# Altium PCB STM_BLUEPILL.PcbDoc
Units mm, origin at the board's own origin, x right, y up, seen from the top; angles counter-clockwise.
Board outline 50 x 50 mm, 4 copper layers (Top Layer, Int1 (GND), Int2 (PWR), Bottom Layer), stack 1.586 mm thick; 47 components, 49 nets, 199 pads, 86 vias.
Unrouted connection lines stored in the file: 87.
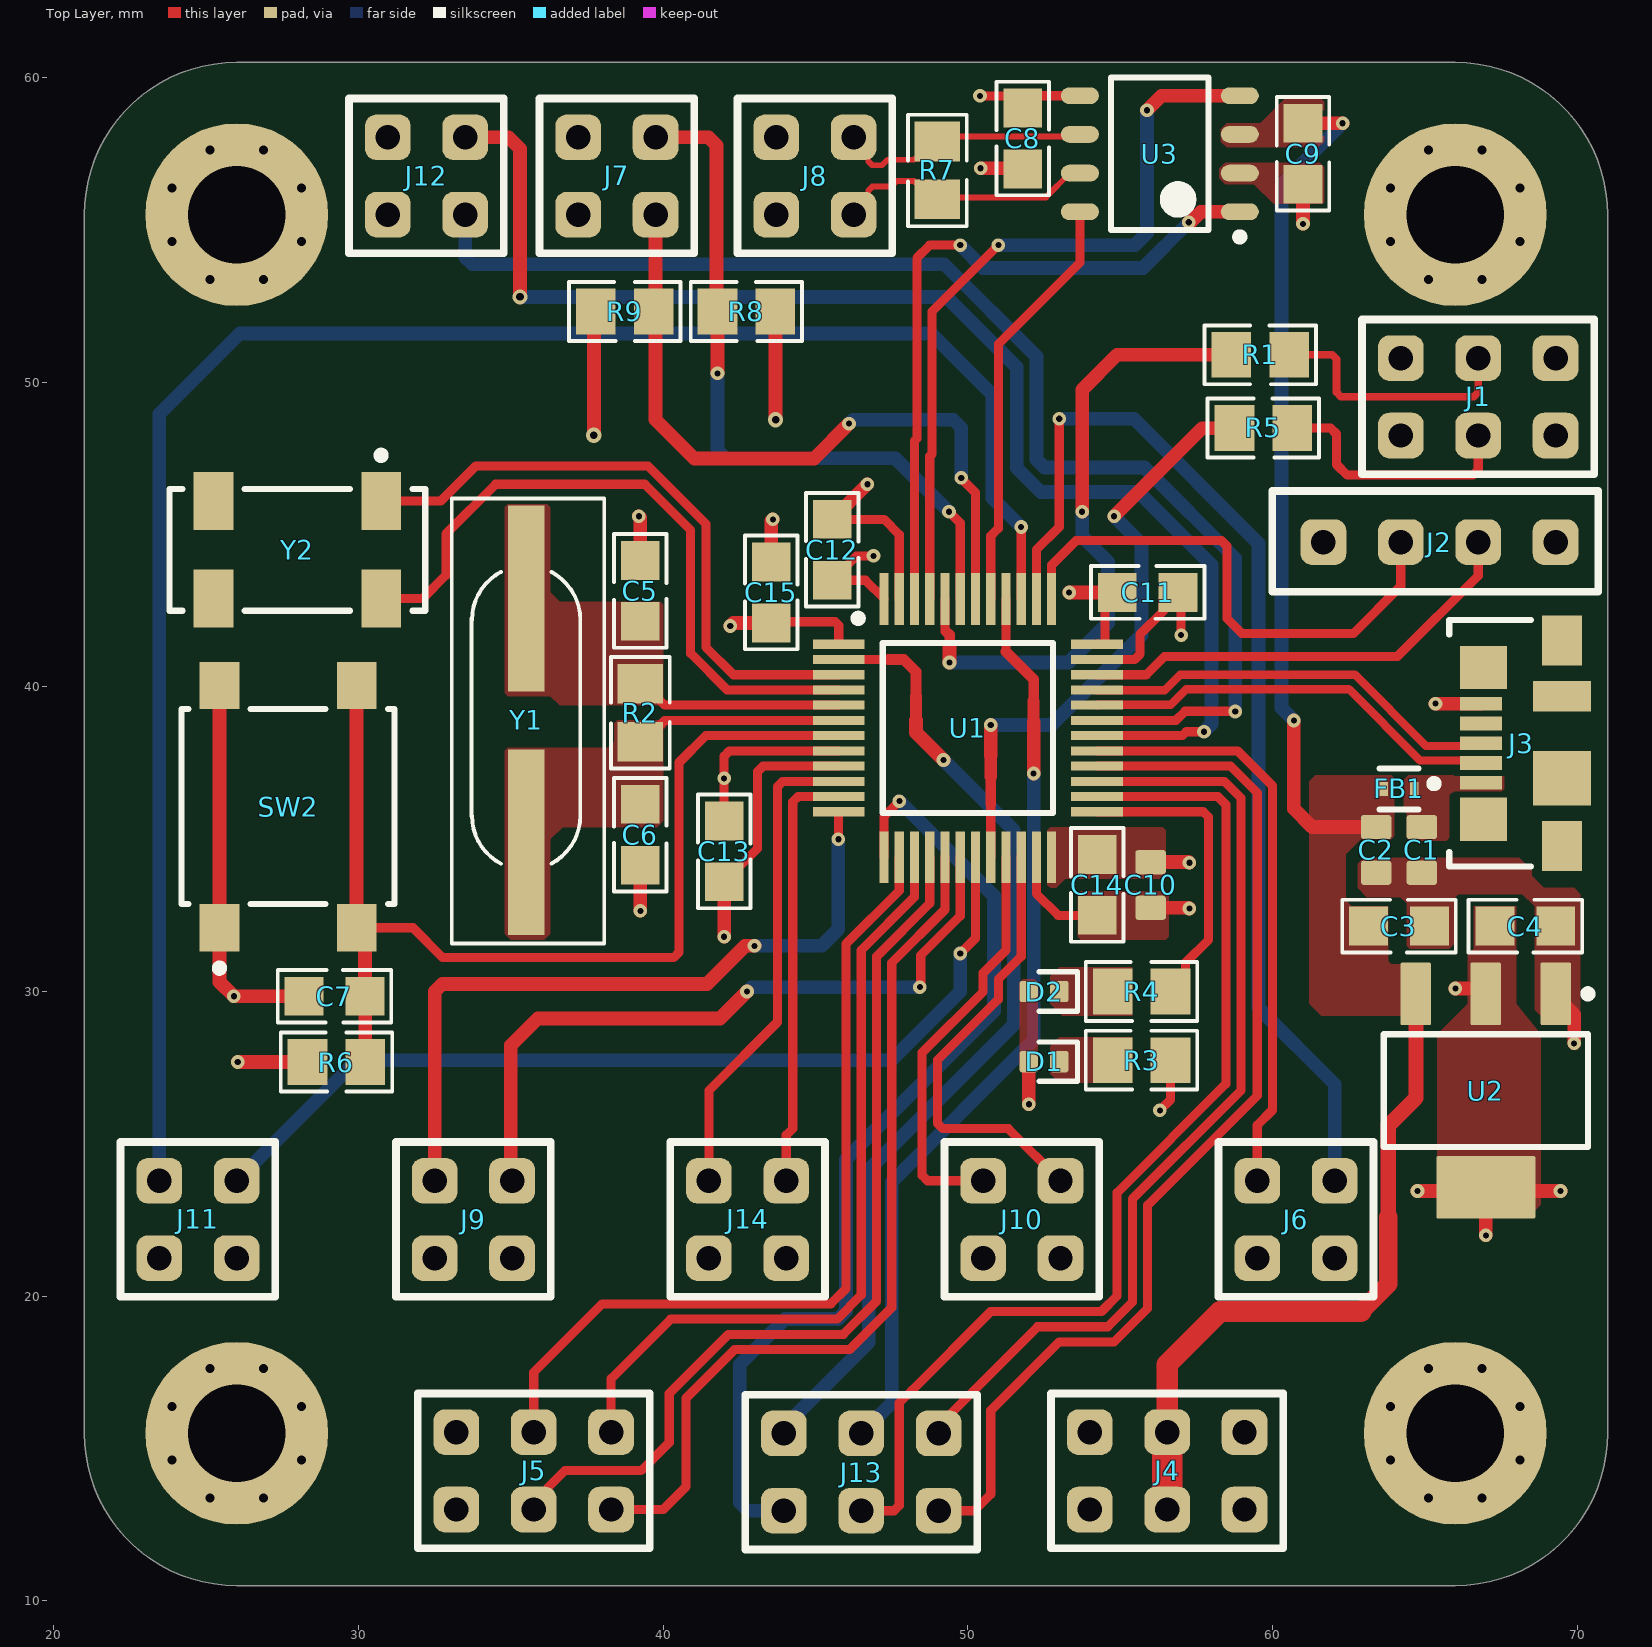
[diagram p0: Top Layer view]
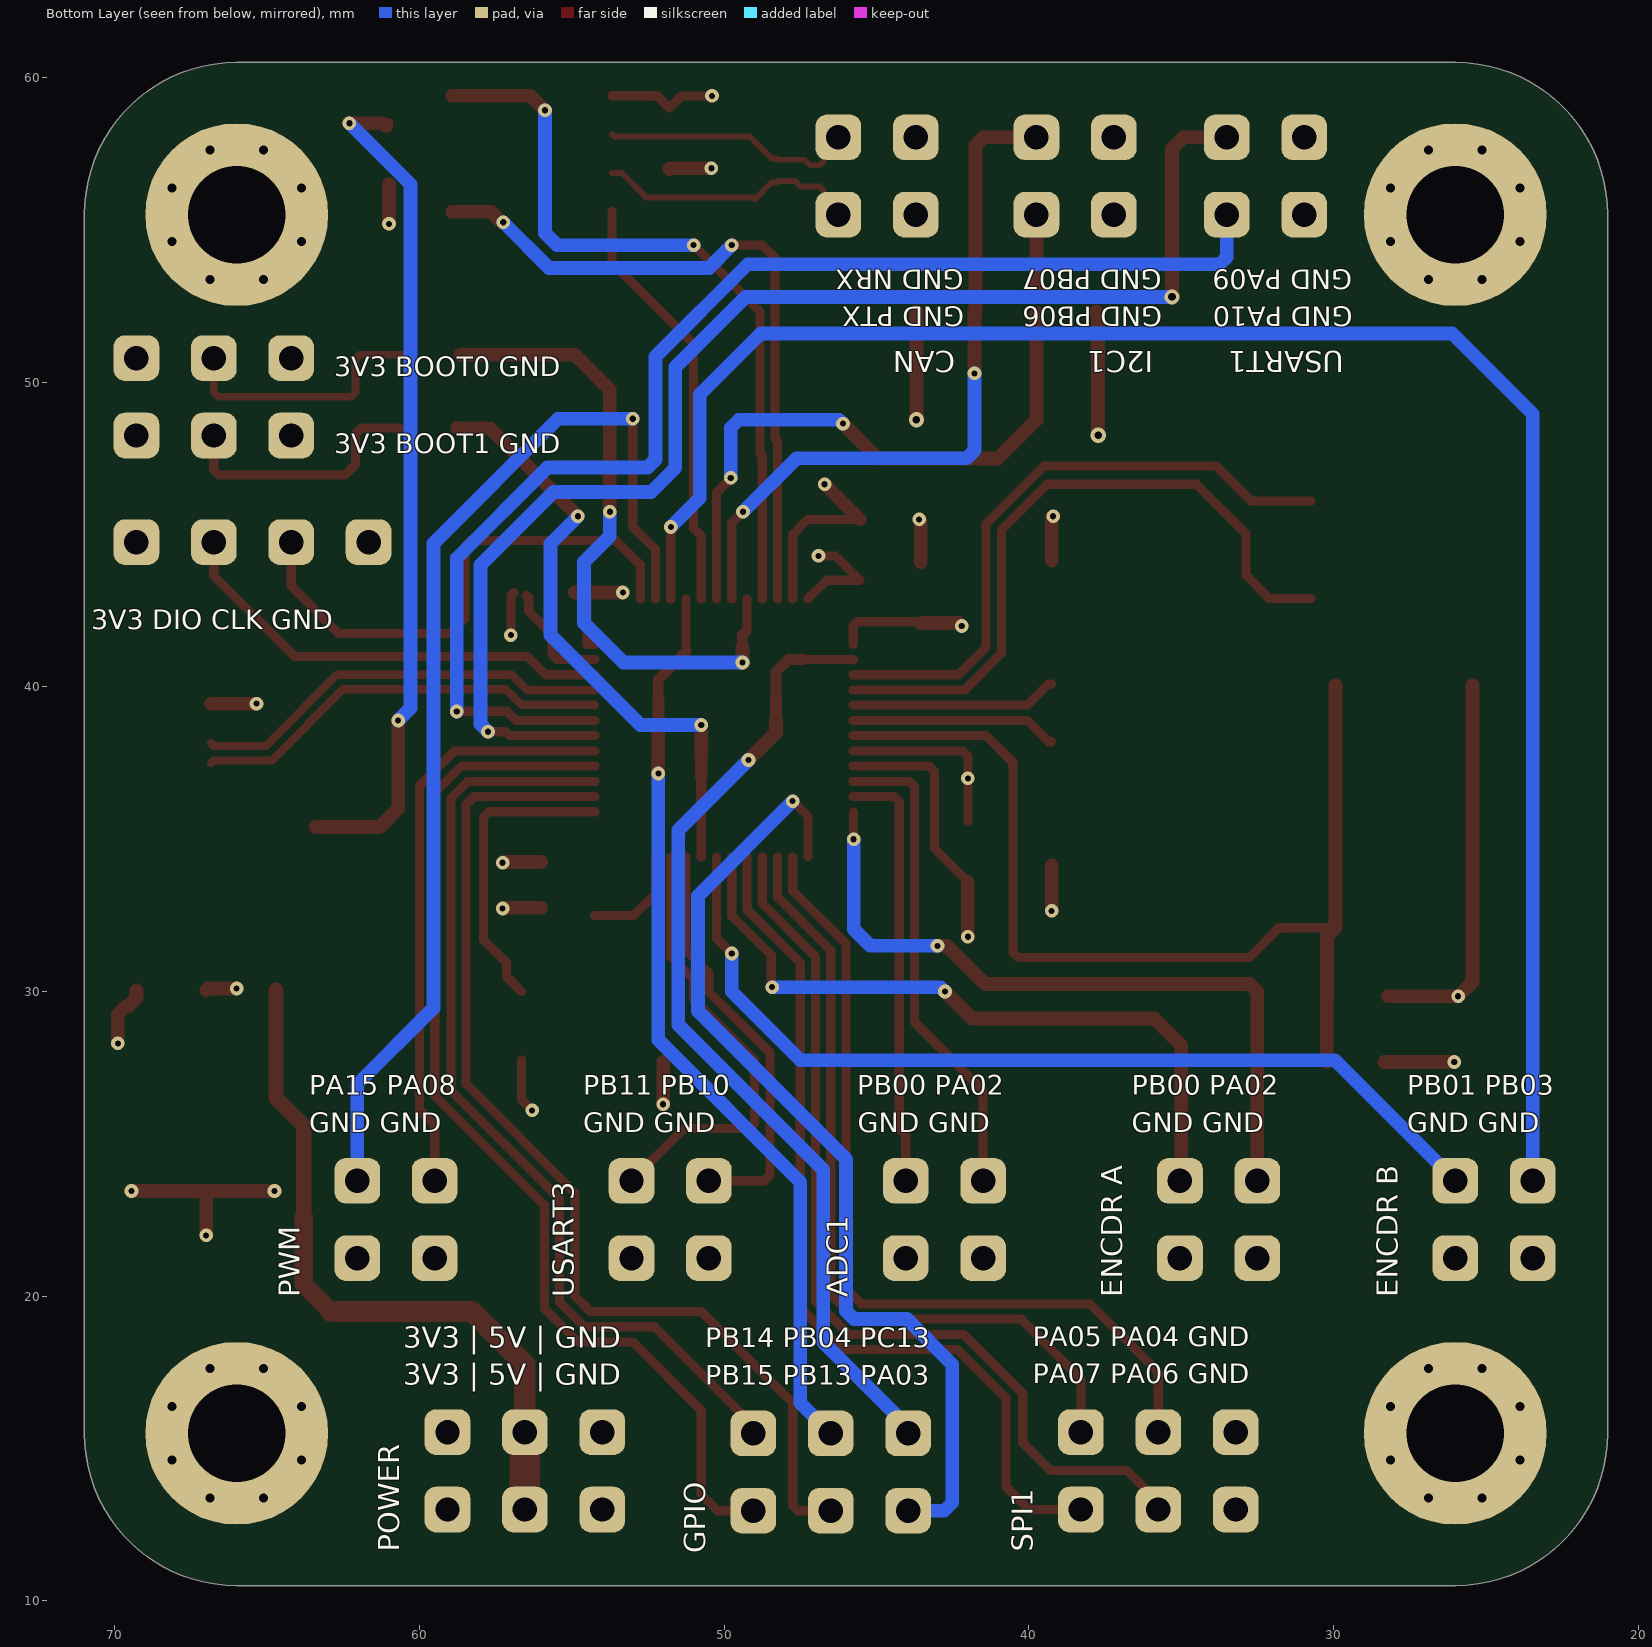
[diagram p1: Bottom Layer view, seen from below]
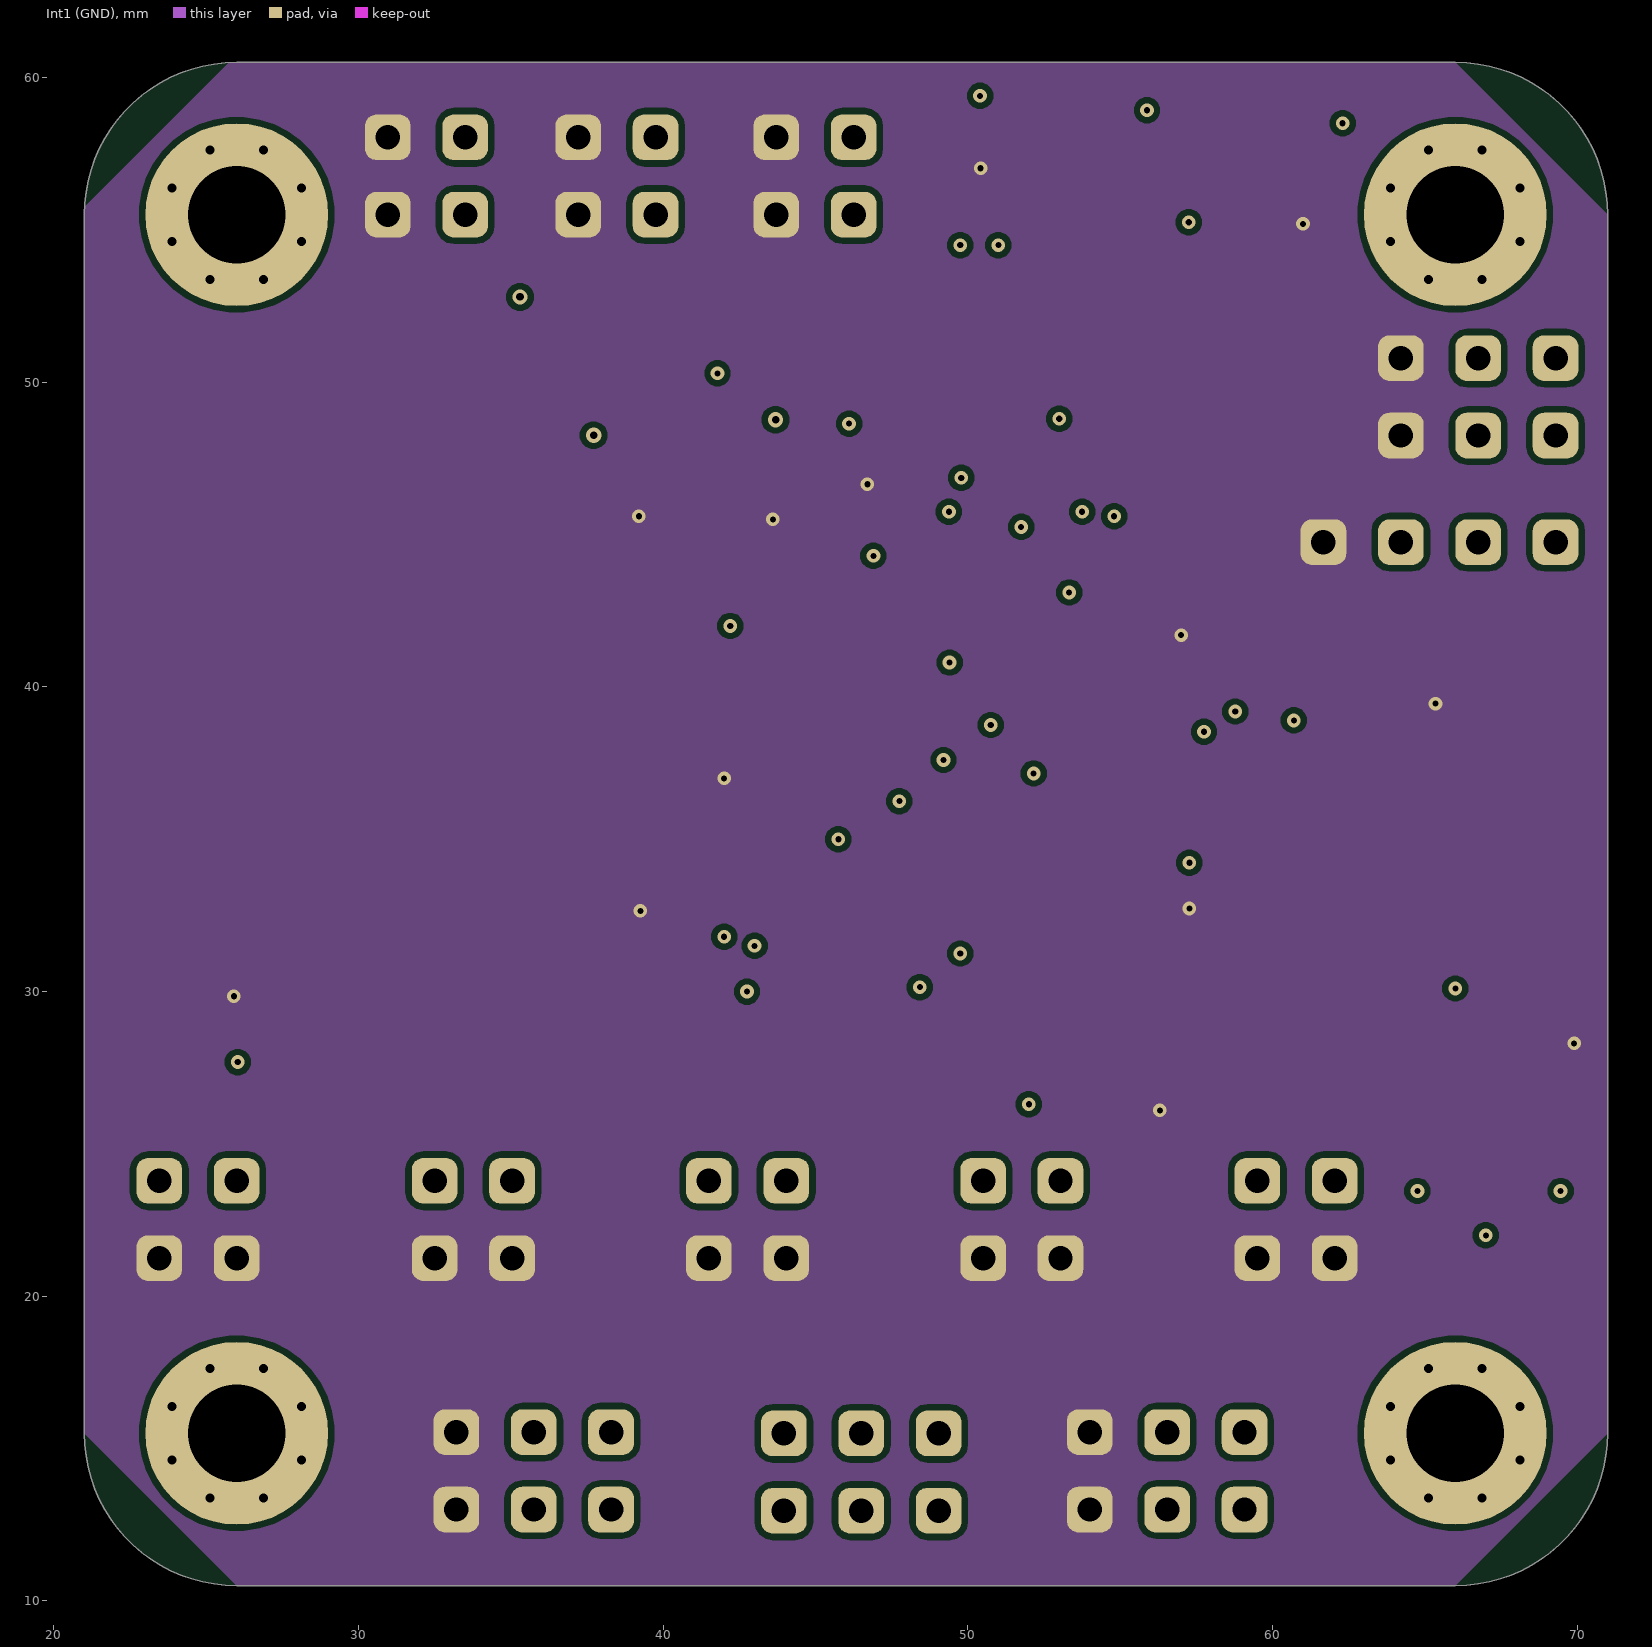
[diagram p2: Int1 (GND)]
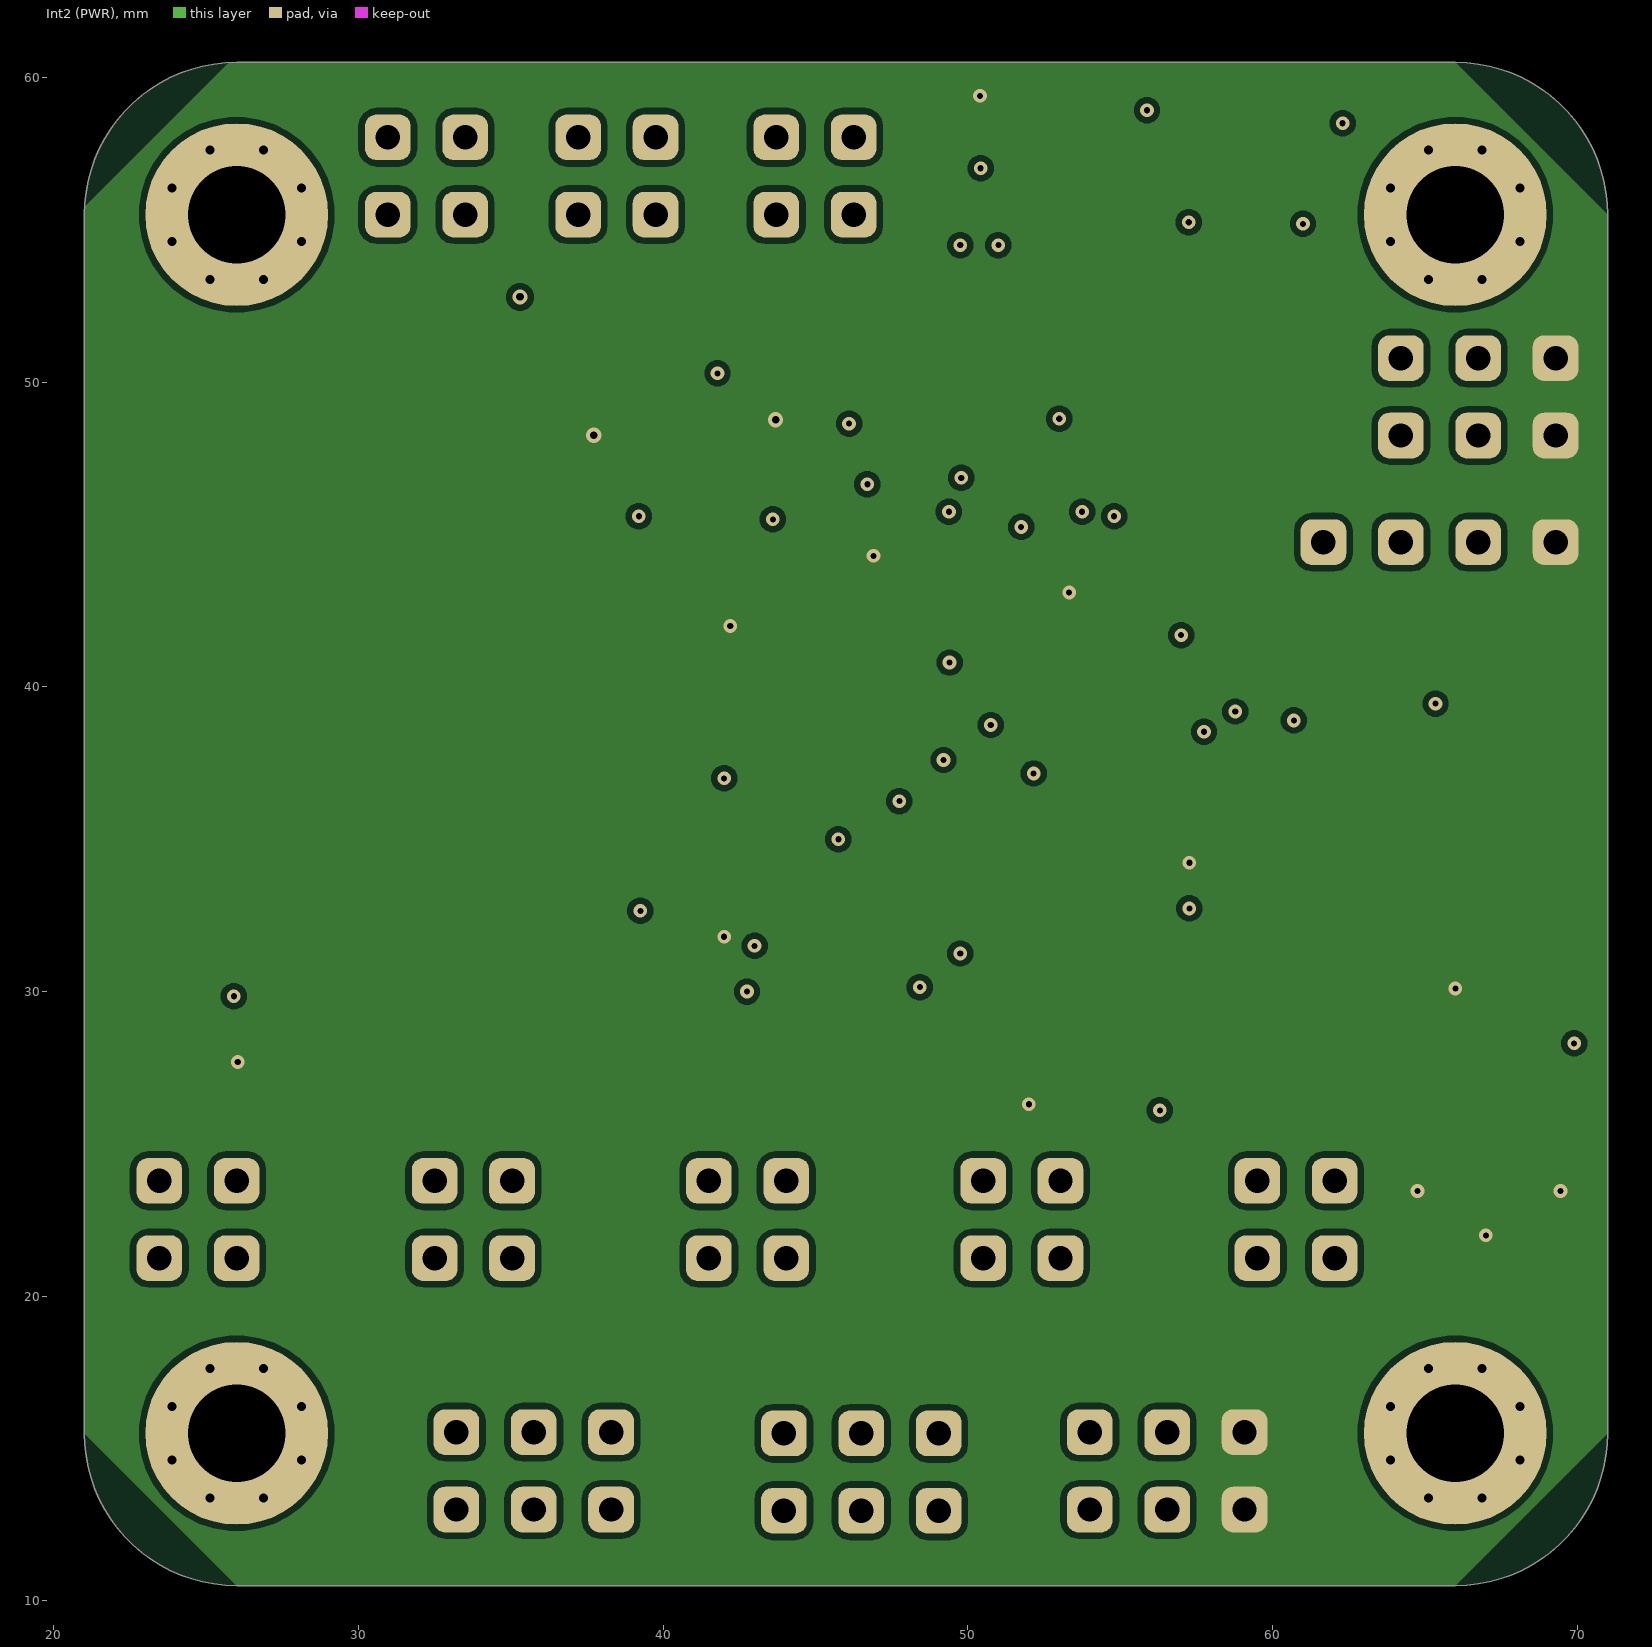
[diagram p3: Int2 (PWR)]

## Layer stack, top to bottom
Top Solder: solder mask 0.0254, SM-001, Dk 4
Top Layer: signal copper 0.035
Dielectric 1: prepreg 0.2104, PP-017, Dk 4.6
Int1 (GND): signal copper 0.0152
Dielectric 3: core 1.065, Core-039, Dk 4.6
Int2 (PWR): signal copper 0.0152
Dielectric 5: prepreg 0.2104, PP-017, Dk 4.6
Bottom Layer: signal copper 0.035
Bottom Solder: solder mask 0.0254, SM-001, Dk 4

## Board outline
21,15.5 21,55.5 cw(c26,55.5) 26,60.5 66,60.5 cw(c66,55.5) 71,55.5 71,15.5 cw(c66,15.5) 66,10.5 26,10.5 cw(c26,15.5)

## Design rules (kind name [scope] priority, off if disabled: settings)
Clearance [All] p1: gap=0.2 ignorepadtopadclearanceinfootprint=TRUE except(0.15: SMDPad-SMDPad; 0.35: Track-THPad)
DiffPairsRouting DiffPairsRouting_D120 [InDifferentialPair('CAN')] p1: maxlimit=0.508 minlimit=0.203 mostfreqgap=0.508 toplayer_mingap=0.508 toplayer_minwidth=0.194 toplayer_maxwidth=0.194 toplayer_prefwidth=0.194 bottomlayer_mingap=0.508 bottomlayer_minwidth=0.194 bottomlayer_maxwidth=0.194 bottomlayer_prefwidth=0.194 impedanceprofiledriven=TRUE impedanceprofileid={BCEBAB5D-B386-4F05-9C62-E750EE5C64B7} impedanceprofilevalue=120.000000 maxuncoupledlength=12.7
DiffPairsRouting DiffPairsRouting_D90 [InDifferentialPair('D')] p2: maxlimit=0.254 minlimit=0.203 mostfreqgap=0.254 toplayer_maxgap=0.203 toplayer_prefgap=0.203 toplayer_minwidth=0.271 toplayer_maxwidth=0.271 toplayer_prefwidth=0.271 bottomlayer_maxgap=0.203 bottomlayer_prefgap=0.203 bottomlayer_minwidth=0.271 bottomlayer_maxwidth=0.271 bottomlayer_prefwidth=0.271 impedanceprofiledriven=TRUE impedanceprofileid={09F78182-9738-4F9D-93D1-7A1E63A3F0BD} impedanceprofilevalue=90.000000 maxuncoupledlength=12.7
HoleSize [All] p1: absolutevalues=TRUE maxlimit=4 minlimit=0.025 maxpercent=80.000 minpercent=20.000
MinimumSolderMaskSliver [All] p1: minsoldermaskwidth=0
PolygonConnect [All] p1: connectstyle=Direct reliefconductorwidth=0.254 reliefentries=4 polygonreliefangle="90 Angle" airgapwidth=0.254
RoutingVias [All] p1: holewidth=0.25 width=0.5 viastyle="Through Hole" minholewidth=0.2 minwidth=0.45 maxholewidth=5 maxwidth=2
SilkToSilkClearance [All] p1: silktosilkclearance=0
SilkToSolderMaskClearance [IsPad] p1: minsilkscreentomaskgap=0 clearancetoexposedcopper=TRUE
SolderMaskExpansion [All] p1: expansion=0.102 istentingtop=FALSE
Width [All] p1: maxlimit=2 minlimit=0.2 preferedwidth=0.45
25 further rules are at their usual default settings.

## Classes and differential pairs
differential pair class DIFF_USB: D
differential pair CAN: +CAN_P -CAN_N
differential pair D: +D_P -D_N

## Components (designator, comment, footprint, x,y, rotation, side; value= is the part's Value field where it differs from the comment)
C1 "2.2u" CAP_0603 64.9,34.65 r90 top
C2 "2.2u" CAP_0603 63.4,34.65 r90 top
C3 "22u" CAP_0805 64.15,32.15 r180 top
C4 "22u" CAP_0805 68.3,32.15 r180 top
C5 "22pF" CAP_0805 39.25,43.15 r270 top
C6 "22pF" CAP_0805 39.25,35.15 r90 top
C7 "0.1uF" CAP_0805 29.21,29.845 r0 top
C8 "0.1uF" CAP_0805 51.8,58 r90 top
C9 "0.1uF" CAP_0805 61,57.5 r90 top
C10 "2.2u" CAP_0603 56,33.5 r90 top
C11 "0.1uF" CAP_0805 55.9,43.1 r180 top
C12 "0.1uF" CAP_0805 45.55,44.5 r270 top
C13 "0.1uF" CAP_0805 42,34.6 r270 top
C14 "0.1uF" CAP_0805 54.25,33.5 r90 top
C15 "0.1uF" CAP_0805 43.55,43.1 r270 top
D1 "GREEN" LED_0402_GREEN 52.5,27.7 r0 top
D2 "YELLOW" LED_0402_YELLOW 52.5,30 r0 top
FB1 "MPZ1005S121CTD25" FP-MPZ1005-IPC_C 64.15,36.65 r180 top
J1 "2X3 Berg Strip" CON6_100_59D78_TH_ST_DUPLICATE 69.29,50.79 r180 top
J2 "4X1 Bergstrip" CON4_100_40D72_TH_ST_MALE 61.67,44.75 r90 top
J3 "473460001" FP-473460001-MFG 69.15,38.15 r90 top
J4 "2X3 Berg Strip" CON6_100_59D78_TH_ST_DUPLICATE 59.08,15.54 r180 top
J5 "2X3 Berg Strip" CON6_100_59D78_TH_ST_DUPLICATE 38.29,15.54 r180 top
J6 "2X3 Berg Strip" CON4_100_59D78_TH_ST_DUPLICATE 59.5,23.79 r270 top
J7 "2X3 Berg Strip" CON4_100_59D78_TH_ST_DUPLICATE 39.75,58.04 r180 top
J8 "2X3 Berg Strip" CON4_100_59D78_TH_ST_DUPLICATE 46.25,58.04 r180 top
J9 "2X3 Berg Strip" CON4_100_59D78_TH_ST_DUPLICATE 32.5,23.79 r270 top
J10 "2X3 Berg Strip" CON4_100_59D78_TH_ST_DUPLICATE 50.5,23.79 r270 top
J11 "2X3 Berg Strip" CON4_100_59D78_TH_ST_DUPLICATE 23.46,23.79 r270 top
J12 "2X3 Berg Strip" CON4_100_59D78_TH_ST_DUPLICATE 33.5,58.04 r180 top
J13 "2X3 Berg Strip" CON6_100_59D78_TH_ST_DUPLICATE 49.04,15.5 r180 top
J14 "2X3 Berg Strip" CON4_100_59D78_TH_ST_DUPLICATE 41.5,23.79 r270 top
R1 "10K" RES_0805 59.6,50.9 r180 top
R2 "10Mohm" RES_0805 39.25,39.15 r90 top
R3 "1K" RES_0805 55.7,27.75 r0 top
R4 "1K" RES_0805 55.7,30 r0 top
R5 "10K" RES_0805 59.7,48.5 r180 top
R6 "10K" RES_0805 29.276,27.686 r0 top
R7 "120R" RES_0805 49,56.95 r90 top
R8 "10K" RES_0805 42.733,52.324 r180 top
R9 "10K" RES_0805 38.735,52.324 r0 top
SW2 "B3S-1000P" FP-B3S-1000P-MFG 27.686,36.068 r90 top
U1 "STM32F103C8T6" LQFP-48_19.6_393_58X11_SMD 50,38.65 r0 top
U2 "TLV1117LV33DCYT" DCY0004A_M 67,26.75 r270 top
U3 "TJA1051T/3,118" NXP-SOIC-8_L 56.3,57.5 r180 top
Y1 "8MHz" XTAL_314_240X47_SMD 35.5,42.9 r270 top
Y2 "ABS25-32.768KHZ-T" FP-ABS25-MFG 27.991,44.501 r180 top

## Footprints (in the part's own frame and the unit in brackets; to place one, negate y for a bottom-side part, rotate by r counter-clockwise, add the part's x,y. Pads: shape width x height; smd on the part's side, far side on the other; paste and mask are expansions set on the pad)
CAP_0603 [mm]
  rrect25% 0.8x1 smd: 1(-0.75,0) 2(0.75,0)
  body extent -0.8,-0.4 0.8,0.4, height 0.51
CAP_0805 [mm] "Ceramic Capacitor"
  rect 1.27x1.27 smd mask+0.076: 1(-1,0) 2(1,0)
  silkscreen extent -1.86,-0.86 1.86,0.86, body extent -1,-0.62 1,0.63, height 0.78
CON4_100_40D72_TH_ST_MALE [mm] "Berg Strip"
  rrect50% 1.5x1.5 hole 0.8: 1(0,0) 2(0,-2.54) 3(0,-5.08) 4(0,-7.62)
  silkscreen extent -1.63,-9.02 1.68,1.68, body extent -1.27,-8.89 1.27,1.27, height 9.5
CON4_100_59D78_TH_ST_DUPLICATE [mm] "Berg Strip"
  rrect50% 1.5x1.5 hole 0.8: 1(0,0) 2(0,2.54) 3(2.54,0) 4(2.54,2.54)
  silkscreen extent -1.27,-1.27 3.81,3.81, body extent -1.27,-1.27 3.81,3.81, height 9.5
CON6_100_59D78_TH_ST_DUPLICATE [mm] "Berg strip"
  rrect50% 1.5x1.5 hole 0.8: 1(0,0) 2(0,2.54) 3(2.54,0) 4(2.54,2.54) 5(5.08,0) 6(5.08,2.54)
  silkscreen extent -1.27,-1.27 6.35,3.81, body extent -1.27,-1.27 6.35,3.81, height 9.5
DCY0004A_M [mm] "SOT223, 4-Leads, Body 6.7x3.7mm, Pitch 2.3mm, IPC Low Density"
  rrect10% 2.05x1 smd: 1(-3.175,2.3) 2(-3.175,0) 3(-3.175,-2.3)
  rrect5% 2.05x3.25 smd: 4(3.175,0)
  silkscreen extent -3.3,-3.35 1.85,3.48, body extent -3.5,-3.25 3.5,3.25, height 1.62
FP-473460001-MFG [mm]
  rect 0.45x1.38 smd paste+0 mask+0: 1(-1.3,2.31) 2(-0.65,2.31) 3(0,2.31) 4(0.65,2.31) 5(1.3,2.31)
  rect 1.425x1.55 smd paste+0 mask+0: 6(-2.488,2.225) 7(2.488,2.225)
  rect 1.65x1.3 smd paste+0 mask+0: 8(-3.375,-0.35) 11(3.375,-0.35)
  rect 1.8x1.9 smd paste+0 mask+0: 9(-1.15,-0.35)
  rect 1x1.9 smd paste+0 mask+0: 10(1.55,-0.35)
  silkscreen extent -4.05,0.67 4.05,3.97, body extent -4.3,-2.48 4.3,3.45, height 0.25
FP-ABS25-MFG [mm]
  rect 1.3x1.9 smd paste+0 mask+0: 1(-2.75,-1.6) 2(2.75,-1.6) 3(2.75,1.6) 4(-2.75,1.6)
  silkscreen extent -4.2,-3.22 4.2,2, body extent -4.3,-2.65 4.3,2.65, height 0.25
FP-B3S-1000P-MFG [mm]
  rect 1.55x1.3 smd paste+0 mask+0: 1(-3.975,2.25) 2(3.975,2.25) 3(-3.975,-2.25) 4(3.975,-2.25)
  silkscreen extent -5.42,-3.5 3.2,3.5, body extent -4.85,-3.6 4.85,3.6, height 0.25
FP-MPZ1005-IPC_C [mm]
  rect 0.272x0.472 smd paste+0 mask+0: 1(-0.5,0) 2(0.5,0)
  silkscreen extent -0.64,-0.67 0.64,0.67, body extent -0.74,-0.38 0.74,0.38, height 0.25
LED_0402_GREEN [mm]
  rrect25% 0.6x0.7 smd: A(-0.5,0) K(0.5,0)
  silkscreen extent -0.15,-0.65 1.1,0.65, body extent -0.51,-0.25 0.51,0.25, height 0.45
LED_0402_YELLOW [mm]
  rrect25% 0.6x0.7 smd: A(-0.5,0) K(0.5,0)
  silkscreen extent -0.15,-0.65 1.1,0.65, body extent -0.51,-0.25 0.51,0.25, height 0.45
LQFP-48_19.6_393_58X11_SMD [mm] "48LQFP"
  rect 1.7x0.3 smd mask+0.076: 1(-4.238,2.75) 2(-4.238,2.25) 3(-4.238,1.75) 4(-4.238,1.25) 5(-4.238,0.75) 6(-4.238,0.25) 7(-4.238,-0.25) 8(-4.238,-0.75) 9(-4.238,-1.25) 10(-4.238,-1.75) 11(-4.238,-2.25) 12(-4.238,-2.75) 25(4.238,-2.75) 26(4.238,-2.25) 27(4.238,-1.75) 28(4.238,-1.25) 29(4.238,-0.75) 30(4.238,-0.25) 31(4.238,0.25) 32(4.238,0.75) 33(4.238,1.25) 34(4.238,1.75) 35(4.238,2.25) 36(4.238,2.75)
  rect 0.3x1.7 smd mask+0.076: 13(-2.75,-4.238) 14(-2.25,-4.238) 15(-1.75,-4.238) 16(-1.25,-4.238) 17(-0.75,-4.238) 18(-0.25,-4.238) 19(0.25,-4.238) 20(0.75,-4.238) 21(1.25,-4.238) 22(1.75,-4.238) 23(2.25,-4.238) 24(2.75,-4.238) 37(2.75,4.238) 38(2.25,4.238) 39(1.75,4.238) 40(1.25,4.238) 41(0.75,4.238) 42(0.25,4.238) 43(-0.25,4.238) 44(-0.75,4.238) 45(-1.25,4.238) 46(-1.75,4.238) 47(-2.25,4.238) 48(-2.75,4.238)
  silkscreen extent -3.72,-2.79 2.79,3.72, body extent -4.5,-4.5 4.5,4.5, height 1.7
NXP-SOIC-8_L [mm] "SOIC, 8-Leads, Body 5x4mm, Pitch 1.27mm, IPC High Density"
  oval 1.25x0.55 smd: 1(-2.625,1.905) 2(-2.625,0.635) 3(-2.625,-0.635) 4(-2.625,-1.905) 5(2.625,-1.905) 6(2.625,-0.635) 7(2.625,0.635) 8(2.625,1.905)
  silkscreen extent -2.75,-2.5 1.6,2.85, body extent -3,-2.5 3,2.5, height 1.75
RES_0805 [mm] "Resister"
  rect 1.3x1.5 smd mask+0.076: 1(0.95,0) 2(-0.95,0)
  silkscreen extent -1.83,-0.97 1.83,0.97, body extent -1,-0.63 1,0.62, height 0.5
XTAL_314_240X47_SMD [mm] "CASE: TH"
  rect 6.096x1.2 smd: 1(0,0) 2(8,0)
  silkscreen extent -3.29,-2.44 11.32,2.57, body extent -2.99,-2.27 10.9,2.41, height 3.05

## Part data
C1 C2 C10: library part CAP_0603, "Capacitor SMD 0603"
C3 C4: library part CAP_0805, "Capacitor SMD 0805"
C5 C6: library part CAP_22pF-50V-5%-0805, "22pF ±5% 50V Ceramic Capacitor C0G, NP0 0805 (2012 Metric)", Case/Package=0805, Manufacturer=KEMET, Manufacturer Part Number=C0805C220J5GACTU, Supplier Part Number-1=399-1113-1-ND, Supplier-1=Digikey
C7 C8 C9 C11 C12 C13 C14 C15: library part CAP_0.1uF-50V-5%-0805, "0.1µF ±5% 50V Ceramic Capacitor X7R 0805 (2012 Metric)", Case/Package="0805 (2012 Metric)", Manufacturer=KEMET, Manufacturing Part Number=C0805C104J5RACTU, Supplier Part Number-1=399-1171-1-ND, Supplier-1=Digikey
D1: library part LED_0402_GREEN, "LED 0402 GREEN SMD"
D2: library part LED_0402_YELLOW, "LED 0402 YELLOW SMD"
FB1: library part CMP-08257-000074-1, "Power line Ferrite Bead 120Ω @ 100MHz 1.2A DCR 0.09Ω AEC-Q200 SMD 0402", Case Code (Imperial)=0402, Case Code (Metric)=1005, DC Resistance (DCR)=90mR, Max Current Rating=1.2A, Max Operating Temperature=125°C, Min Operating Temperature=-55°C, Package Quantity=10000, Ratings=AEC-Q200, Test Frequency=100MHz, Tolerance=25%, Case/Package=0402, Height=0.022inch, Impedance=120R, Lead Free="Lead Free", Length=0.039inch, Max DC Current=1.2A, Mount="Surface Mount", Number of Lines=1, Packaging="Tape and Reel", RoHS Compliant=Yes, Termination=SMD/SMT, Weight=2.3E-05oz, Width=0.02inch
J1 J4 J5 J13: library part CON-BS-PLG_2X3-100-TH-ST, "6 pin, 2 row, 2.54mm pitch bergstrip", Case/Package=TH, Manufacturer=NA, Manufacturer Part Number=NA, Supplier Part Number-1=NA, Supplier-1=NA
J2: library part CON-BS-PLG_4X1-100-TH-ST, "4 pin, 1 row, 2.54mm pitch bergstrip", Case/Package=TH, Manufacturer=NA, Manufacturing Part Number=NA, Supplier Part Number-1=NA, Supplier-1=NA
J3: library part CMP-2000-05246-2, "CONN RCPT USB2.0 MICRO B SMD R/A", Current Rating=1.8A, Manufacturer=Molex, Package=0, Temperature="-30°C to +85°C", Temperature Range High=+85°C, Temperature Range Low=-30°C, Voltage Rating=30V, Automotive=No, Category=Conn, ComponentLink2Description=Datasheet, ComponentLink2URL=https://www.molex.com/webdocs/datasheets/pdf/en-us/0473460001_IO_CONNECTORS.pdf, Conn Orientation="Right Angle", Contact Material=Gold,Nickel, Device Class L1=Connectors, Device Class L2="USB Connectors", Device Class L3=unset, Digikey Description="CONN RCPT USB2.0 MICRO B SMD R/A", Footprint Url=https://www.molex.com/pdm_docs/sd/473460001_sd.pdf, Height=2.945mm, Is Female=yes, Lead Free=Yes, Manufacturer Part Number=473460001, Number Of Contacts=5, Octopart=https://octopart.com/47346-0001-molex-7164928, Pitch=0.65mm, RoHS=TRUE, Shielding=true, Usb Standard="USB 2.0"
J6 J7 J8 J9 J10 J11 J12 J14: library part CON-BS-PLG_2X2-100-TH-ST, "4 pin, 2 row, 2.54mm pitch bergstrip"
R1 R5 R6 R8 R9: library part RES_10K-0.125W-1%-0805, "10 kOhms ±1% 0.125W, 1/8W Chip Resistor 0805 (2012 Metric) Moisture Resistant Thick Film", Case/Package=0805, Manufacturer=Yageo, Manufacturing Part Number=RC0805FR-0710KL, Supplier Part Number-1=311-10.0KCRCT-ND, Supplier-1=Digikey
R2: library part RES_10MOHM-0.125W-1%-0805, "10 MOhms ±1% 0.125W, 1/8W Chip Resistor 0805 (2012 Metric) Automotive AEC-Q200, High Voltage Thick Film", Case/Package="0805 (2012 Metric)", Manufacturer="Rohm Semiconductor", Manufacturing Part Number=KTR10EZPF1005, Supplier Part Number-1=RHM10.0MAHCT-ND, Supplier-1=Digikey
R3 R4: library part RES_1K-0.125W-1%-0805, "1 kOhms ±1% 0.125W, 1/8W Chip Resistor 0805 (2012 Metric) Moisture Resistant Thick Film", Case/Package=0805, Manufacturer=垈㎵á, Manufacturer Part Number=RC0805FR-071KL, Supplier Part Number-1=311-1.00KCRCT-ND, Supplier-1=Digikey
R7: library part RES_0805, "Resistor SMD 0805"
SW2: library part CMP-08834-000008-1, "SWITCH TACTILE SPST-NO 0.05A 24V", Contact Current Rating=50mA, Contact Resistance=100mR, Max Operating Temperature=70°C, Max Voltage Rating (DC)=24V, Min Operating Temperature=-25°C, Operating Force=1.57N, Package Quantity=1, Ratings=IP67, Actuator Length=0.8mm, Actuator Type=Standard, Contact Material=Bronze, Contact Plating=Silver, Current Rating=50mA, Depth=9mm, Electrical Life=500000Cycles, Height=3.65mm, Illumination Type=Non-Illuminated, Lead Free="Lead Free", Length=6.6mm, Max Current Rating=50mA, Mechanical Life=500000Cycles, Mount="Surface Mount", Number of Poles=1, Orientation=Straight, Packaging="Tape and Reel", Radiation Hardening=No, REACH SVHC="No SVHC", Switch Function=Off-Mom, Switch Travel=0.25mm, Termination="Gull Wing", Throw Configuration=SPST, Voltage Rating (DC)=24V, Weight=0.010582oz, Width=6mm
U1: library part "IC-STM32F103C8T6 _1", "ARM® Cortex®-M3 STM32F1 Microcontroller IC 32-Bit 72MHz 64KB (64K x 8) FLASH", Case/Package=48-LQFP, Manufacturer=STMicroelectronics, Supplier Part Number-1=497-6063-ND, Manufacturer Part Number=STM32F103C8T6, Supplier-1=Digikey
U2: library part CMP-0395-00499-2, "Single Output LDO, 1 A, Fixed 3.3 V Output, 2 to 5.5 V Input, 4-pin SOT-223 (DCY), -40 to 125 degC, Green (RoHS & no Sb/Br)", Manufacturer="Texas Instruments", Accuracy(%)=2, Code_JEDEC=TO-261, ComponentLink1Description="Manufacturer URL", ComponentLink1URL=http://www.ti.com/, ComponentLink2Description=Datasheet, ComponentLink2URL=http://www.ti.com/general/docs/lit/getliterature.tsp?genericPartNumber=TLV1117LV33&fileType=pdf, ComponentLink3Description="Package Specification", ComponentLink3URL=http://www.ti.com/litv/pdf/mpds094a, DatasheetVersion=SBVS160A, Eco-Plan="Green (RoHS & no Sb/Br)", Fixed Output Options(V)=3.3, Iout(Max)(A)=1, Iq(Typ)(mA)=0.05, Mounting Technology="Surface Mount", PackageDescription="4-Pin Plastic Small Outline, Body 3.5 x 6.5 mm, Pitch 2.3 mm", PackageReference=DCY0004A, PackageVersion=4202506/B, PartNumber=TLV1117LV33DCYT, SubFamily="Single Channel LDO", Vdo(Typ)(mV)=1200, Vin(Max)(V)=5.5, Vin(Min)(V)=2, Vout Adj(Max)(V)=3.3, Vout Adj(Min)(V)=3.3
U3: library part CMP-2000-07245-1, "High-Speed CAN Transceiver, 3 to 5 V, 8-Pin SOIC (SOT96-1), RoHS, Tape and Reel", Manufacturer=NXP, Operating Supply Voltage (Max)=5.5V, Operating Supply Voltage (Min)=4.5V, Operating Supply Voltage (Typ)=5V, Operating Temperature (Max)=125C, Operating Temperature (Min)=-40C, Operating Temperature Classification=Automotive, Package Description="8-Pin Small Outline Integrated Circuit, Body 4.9 x 3.9 mm, Pitch 1.27 mm", Package Reference=SOT96-1, Package Type=SO, Power Down Mode=Normal/Silent, Supply Current=70mA, Category=Transceiver, Data Rate=1Mbps, Datasheet URL=http://www.nxp.com/documents/data_sheet/TJA1051.pdf, Datasheet Version="Rev. 7, 01/2015", DELETED=Compliant, Manufacturer URL=http://www.nxp.com/, Mounting=SurfaceMount, Mounting Technology=SurfaceMount, Number of Transceivers=1, Packaging=TapeandReel, Pin Count=8, Rad Hardened=No, Standard Supported=ISO11898-2
Y1: library part XTAL_8MHZ-LFXTAL030234, "Crystals 8MHz 22pF -20C 70C", Case/Package=SMD, Manufacturer="IQD Frequency Products", Manufacturing Part Number=LFXTAL030234Reel, Supplier Part Number-1=449-LFXTAL030234REEL, Supplier-1=Mouser
Y2: library part CMP-2000-05037-2, "CRYSTAL 32.7680KHZ 12.5PF SMD", Case/Package=SMD/SMT, ESR (Equivalent Series Resistance)=50kR, Frequency=32.768kHz, Frequency Tolerance=20ppm, Load Capacitance=12.5pF, Max Operating Temperature=85°C, Min Operating Temperature=-40°C, Operating Frequency="32.768 kHz", Package Quantity=1000, Depth=3.8mm, Height=0.098inch, Lead Free="Lead Free", Length=8mm, Mount="Surface Mount", Number of Pins=4, Packaging="Tape and Reel", Radiation Hardening=No, REACH SVHC="No SVHC", RoHS Compliant=Yes, Series=ABS25, Series Resistance=50kR, Termination=SMD/SMT, Tolerance=20ppm, Width=3.8mm

## Free pads (board coordinates)
  round 6 hole 3.2: 0(26,15.5) 0(26,55.5) 0(66,15.5) 0(66,55.5)

## Via types
v1: diameter 0.45, hole 0.2, Top Layer to Bottom Layer, 51 vias
v2: diameter 0.6, hole 0.3, Top Layer to Bottom Layer, tented both sides, 32 vias
v3: diameter 0.5, hole 0.25, Top Layer to Bottom Layer, 3 vias

## Nets (pads, with @x,y where several pads share a name; then routed paths per layer and width w, separated by ;. In a path a pad name is that pad's centre, name@x,y a point inside that pad or via, vN(x,y) a via of type N, cw(c..) or ccw(c..) an arc to the next point about the centre after c; other vN are vias at no path point)
+3V3: C4.2 C8.2 C10.2 C11.2 C12.2 C13.2 C14.2 C15.2 D1.A D2.A J1.1 J1.2 J2.4 J4.1 J4.2 R6.2 R8.2 R9.2 U1.1 U1.9 U1.24 U1.36 U1.48 U2.2 U2.4 U3.5 | length 43.2
  Top Layer w0.3: C13.2@42.118,33.718 42.485,34.085 43.1,34.7 43.1,37.224 43.276,37.4 U1.9 ; C15.2 43.588,42.138 45.645,42.138 45.762,42.021 U1.1 ; v1(46.9,44.3) 46.35,44.3 C12.2 46.638,43.5 U1.48 ; v1(50.4,59.4) 51.4,59.4 C8.2 52.205,59.405 U3.5 ; U1.36 54.5,41.4 C11.2@54.5,43
  Top Layer w0.45: v1(26.035,27.686) R6.2 ; v3(37.719,48.26) 37.729,48.27 37.729,52.268 R9.2 ; v1(42,31.8) C13.2 ; v1(42.2,42) 42.3,42.1 C15.2 ; R8.2 43.686,52.322 43.686,48.77 v3(43.688,48.768) ; v1(52,26.3) D1.A ; v1(53.325,43.1) C11.2 ; C10.2 57.25,34.25 v1(57.271,34.229) ; v1(64.755,23.455) U2.4@67,23.455 ; v1(66,30.1) 66.945,30.1 U2.2@67,30.045 ; v1(67,22) U2.4@67,23.455 ; v1(69.455,23.455) U2.4@67,23.455
+5V: C2.2 C3.2 C9.2 FB1.2 J4.3 J4.4 U2.3 U3.3 | length 51
  Top Layer w0.3: C9.2 C9.2@61.1,58.4
  Top Layer w0.45: v1(60.7,38.9) 60.7,36 61.3,35.4 C2.2 ; C9.2@61.1,58.4 61.2,58.5 v1(62.3,58.5)
  Top Layer w0.5: 63.8,22.6 63.8,25.6 64.71,26.51 U2.3@64.71,30.045
  Top Layer w0.6: 62.9,19.5 63.8,20.4 63.8,22.6
  Top Layer w0.7: J4.3 56.54,17.76 58.28,19.5 62.9,19.5
  Top Layer w1: J4.4 J4.3
  Bottom Layer w0.45: v1(60.7,38.9) 60.296,39.304 60.296,56.496 v1(62.3,58.5)
ADC1_IN0: J14.1 U1.10 | length 16
  Top Layer w0.3: J14.1 41.5,26.75 43.75,29 43.75,36.724 43.926,36.9 U1.10
ADC1_IN1: J14.2 U1.11 | length 14.1
  Top Layer w0.3: J14.2 44.04,25.29 44.25,25.5 44.25,36.224 44.426,36.4 U1.11
BOOT0: J1.3 R1.2 | length 8.6
  Top Layer w0.25: R1.2 61.954,50.9 62.1,50.753 62.1,49.671 62.247,49.525 66.604,49.525 66.75,49.671 J1.3
BOOT1: J1.4 R5.2 | length 8.5
  Top Layer w0.3: R5.2 61.9,48.5 62.1,48.3 62.1,47.3 62.45,46.95 66.574,46.95 66.75,47.126 J1.4
CAN_N: J8.1 R7.1 U3.6 | length 8.4
  Top Layer w0.194: J8.1 46.731,57.559 46.731,57.252 46.862,57.121 47.184,57.121 47.364,57.301 48.233,57.301 48.279,57.347 48.447,57.347 R7.1 49.168,58.068 53.608,58.068 U3.6
CAN_P: J8.2 R7.2 U3.7 | length 8.7
  Top Layer w0.194: J8.2 46.731,55.981 46.731,56.288 46.862,56.419 47.475,56.419 47.655,56.599 48.233,56.599 48.279,56.553 48.447,56.553 R7.2 49.068,56.068 52.558,56.068 53.355,56.865 U3.7
CAN_RX: U1.45 U3.4 | length 24.9
  Top Layer w0.3: U1.45 48.75,47.569 48.827,47.646 48.827,52.327 v1(51,54.5)
  Top Layer w0.45: v1(55.88,58.928) 56.357,59.405 U3.4
  Bottom Layer w0.45: v1(51,54.5) 55.486,54.5 55.88,54.894 v1(55.88,58.928)
CAN_S: U1.41 U3.8 | length 13.9
  Top Layer w0.3: U1.41 50.75,44.951 51,45.201 51,51.25 53.675,53.925 U3.8
CAN_TX: U1.46 U3.1 | length 23.1
  Top Layer w0.3: U1.46 48.25,48.072 48.327,48.149 48.327,54.077 48.75,54.5 v1(49.75,54.5)
  Top Layer w0.45: v1(57.25,55.25) 57.302,55.25 57.647,55.595 U3.1
  Bottom Layer w0.45: v1(49.75,54.5) 50.5,53.75 55.75,53.75 v1(57.25,55.25)
D_N: J3.2 U1.32 | length 13.8
  Top Layer w0.271: U1.32 54.251,39.413 56.658,39.413 57.171,39.926 62.504,39.926 64.842,37.588 66.752,37.588 J3.2
D_P: J3.3 U1.33 | length 13.8
  Top Layer w0.271: U1.33 54.251,39.887 56.462,39.887 56.975,40.4 62.7,40.4 65.038,38.062 66.752,38.062 J3.3
"ENCODER A1": J9.1 U1.12 | length 24.2
  Top Layer w0.2: U1.12@45.75,35.888 U1.12
  Top Layer w0.3: v1(45.75,35) U1.12@45.75,35.888
  Top Layer w0.45: J9.1 32.5,30 32.75,30.25 41.434,30.25 42.684,31.5 v1(43,31.5)
  Bottom Layer w0.45: v1(43,31.5) 45.2,31.5 45.75,32.05 v1(45.75,35)
"ENCODER A2": J9.2 U1.18 | length 22.9
  Top Layer w0.3: v1(48.423,30.144) 48.452,30.173 48.452,31.186 49.75,32.485 49.75,33.001 U1.18
  Top Layer w0.45: J9.2@35,24.359 35,28.236 35.882,29.118 41.868,29.118 v1(42.75,30)
  Bottom Layer w0.45: v1(42.75,30) 42.894,30.144 v1(48.423,30.144)
"ENCODER B1": J11.1 U1.39 | length 61.5
  Top Layer w0.3: U1.39 v1(51.75,45.25)
  Bottom Layer w0.45: J11.1 23.46,48.96 26.1,51.6 48.8,51.6 50.8,49.6 50.8,46.2 v1(51.75,45.25)
"ENCODER B2": J11.2 U1.19 | length 30.9
  Top Layer w0.3: v1(49.75,31.25) 50.25,31.75 U1.19
  Bottom Layer w0.45: J11.2 29.96,27.75 47.5,27.75 49.75,30 v1(49.75,31.25)
GND: C1.1 C2.1 C3.1 C4.1 C5.1 C6.1 C7.1 C8.1 C9.1 C10.1 C11.1 C12.1 C13.1 C14.1 C15.1 J1.5 J1.6 J2.1 J3.5 J4.5 J4.6 J5.5 J5.6 J6.3 J6.4 J7.3 J7.4 J8.3 J8.4 J9.3 J9.4 J10.3 J10.4 J11.3 J11.4 J12.3 J12.4 J14.3 J14.4 R3.1 SW2.1 SW2.2 U1.8 U1.23 U1.35 U1.47 U2.1 U3.2 | length 47.2
  Top Layer w0.3: C13.1 v1(42,37) ; v1@42,37.014 42,37.724 42.176,37.9 44.974,37.9 U1.8 ; C12.1 47.25,45.5 47.75,45 U1.47 ; U1.23 52.25,33.712 52.25,33.215 52.965,32.5 C14.1 ; U1.35 55.474,40.9 55.65,41.076 55.65,41.723 56.415,42.488 56.415,42.915 C11.1@56.5,43 ; v1(56.3,26.1) 56.65,26.45 R3.1 ; C11.1 57,43 v1(57,41.7)
  Top Layer w0.45: SW2.2 SW2.1 25.436,30.317 v1(25.908,29.845) C7.1 ; v1(39.2,45.6) 39.25,45.55 C5.1 ; v1(39.25,32.65) C6.1 ; C15.1 43.55,45.45 v1(43.6,45.5) ; C12.1 v1(46.7,46.65) ; v1(50.419,57.023) 51.777,57.023 C8.1 ; C10.1 57.25,32.75 v1(57.271,32.729) ; v1(61,55.2) C9.1 ; v1(65.35,39.45) J3.5 ; U2.1@69.29,30.045 69.29,29.795 69.565,29.52 69.636,29.52 69.9,29.256 v1(69.9,28.3)
I2C1_SCL: J7.2 R9.1 U1.42 | length 23.2
  Top Layer w0.3: v1(49.784,46.863) 49.784,46.84 50.25,46.374 U1.42
  Top Layer w0.45: R9.1@39.75,52.275 39.75,48.769 41.021,47.498 44.958,47.498 v1(46.101,48.641) ; R9.1@39.75,52.8 J7.2
  Bottom Layer w0.45: v1(46.101,48.641) 46.228,48.768 49.52,48.768 49.784,48.504 v1(49.784,46.863)
I2C1_SDA: J7.1 R8.1 U1.43 | length 24
  Top Layer w0.3: v1(49.379,45.75) 49.75,45.379 U1.43
  Top Layer w0.45: J7.1@39.308,58.04 J7.1 41.486,58.04 41.75,57.776 R8.1@41.75,52.324 ; v1(41.783,50.292) R8.1
  Bottom Layer w0.45: v1(41.783,50.292) 41.783,47.765 42.047,47.501 47.628,47.501 v1(49.379,45.75)
NetD1_K: D1.K R3.2
NetD2_K: D2.K R4.2
NetR1_1: R1.1 U1.44 | length 21.8
  Top Layer w0.3: U1.44 49.25,42.1 49.25,41.893 49.279,41.864 49.279,41.829
  Top Layer w0.35: 49.279,41.829 49.4,41.708 49.4,41.5 49.4,41.3 49.4,41 v1(49.4,40.8)
  Top Layer w0.45: v1(49.4,40.8) 49.4,41.3 ; v1(53.75,45.75) 53.75,49.75 54.9,50.9 R1.1
  Bottom Layer w0.45: v1(49.4,40.8) 53.3,40.8 54.6,42.1 54.6,44.1 53.75,44.95 v1(53.75,45.75)
NetR5_1: R5.1 U1.20 | length 19.9
  Top Layer w0.3: U1.20 50.75,36.15
  Top Layer w0.35: 50.75,36.15 50.75,37.05
  Top Layer w0.4: 50.75,37.05 50.75,37.75
  Top Layer w0.45: 50.75,37.75 v1(50.75,38.75) ; v1(54.8,45.6) 57.689,48.489 58.739,48.489 R5.1
  Bottom Layer w0.45: v1(50.75,38.75) 52.75,38.75 55.7,41.7 55.7,44.7 v1(54.8,45.6)
NRST: C7.2 R6.1 SW2.3 SW2.4 U1.7 | length 35.4
  Top Layer w0.3: SW2.3 31.788,32.093 32.766,31.115 40.342,31.115 40.518,31.291 40.518,37.518 41.4,38.4 U1.7
  Top Layer w0.45: SW2.4 SW2.3 30.21,31.819 C7.2 30.218,29.837 30.218,27.694 R6.1
PA3: J13.6 U1.13 | length 32.4
  Top Layer w0.3: U1.13 47.25,35.75 v1(47.75,36.25)
  Bottom Layer w0.45: J13.6 42.777,12.96 42.514,13.224 42.514,17.764 44,19.25 45.736,19.25 46,19.514 46,24.5 50.859,29.359 50.859,33.141 v1(47.75,36.25)
PB4: J13.3 U1.40 | length 30.1
  Top Layer w0.3: 51.25,41.15 U1.40
  Top Layer w0.35: 51.25,41.15 52.159,40.241 52.159,39.541
  Top Layer w0.4: 52.159,38.841 52.159,39.541
  Top Layer w0.45: v1(52.159,37.159) 52.159,38.841
  Bottom Layer w0.45: J13.3 47.5,16.5 47.5,23.75 52.159,28.409 v1(52.159,37.159)
PB12: R4.1 U1.25 | length 10
  Top Layer w0.3: U1.25 57.724,35.9 57.9,35.724 57.9,31.7 57.143,30.943 57.143,30.493 R4.1
PB13: J13.4 U1.26 | length 35.2
  Top Layer w0.3: J13.4 47.574,12.96 47.75,13.136 47.75,16.5 48.154,16.904 50.75,19.5 54.386,19.5 54.9,20.014 54.9,23.4 58.468,26.968 58.468,36.14 58.209,36.4 U1.26
PB14: J13.1 U1.27 | length 31.3
  Top Layer w0.3: J13.1 49.04,15.75 52.29,19 54.593,19 55.4,19.807 55.4,23.193 58.968,26.761 58.968,36.347 58.416,36.9 56.217,36.9 U1.27
PB15: J13.2 U1.28 | length 35.3
  Top Layer w0.3: J13.2 50.21,12.96 50.75,13.5 50.75,16.25 53,18.5 54.8,18.5 55.9,19.6 55.9,22.986 59.5,26.586 59.5,36.523 58.623,37.4 56.424,37.4 U1.28
PC13: J13.5 U1.2 | length 32.2
  Top Layer w0.3: U1.2 47.4,40.9
  Top Layer w0.35: 47.4,40.9 47.9,40.9 48.3,40.5 48.3,39.7
  Top Layer w0.4: 48.3,38.9 48.3,39.7
  Top Layer w0.45: 48.3,38.9 48.3,38.5 v1(49.2,37.6)
  Bottom Layer w0.45: J13.5 43.96,15.71 46.75,18.5 46.75,24.162 51.509,28.92 51.509,35.291 v1(49.2,37.6)
PWM1: J6.1 U1.29 | length 19.4
  Top Layer w0.3: U1.29 57.011,37.9 58.85,37.9 60,36.75 60,26.112 59.5,25.612 J6.1
PWM2: J6.2 U1.38 | length 36.4
  Top Layer w0.3: U1.38 52.25,44.5 53,45.25 v1(53,48.8)
  Bottom Layer w0.45: v1(53,48.8) 55.45,48.8 59.54,44.71 59.54,29.46 62.04,26.96 J6.2
SPI1_MISO: J5.4 U1.16 | length 30.5
  Top Layer w0.3: J5.4 36.211,13.461 36.211,13.711 36.775,14.275 39.275,14.275 40.2,15.2 40.2,16.807 42.143,18.75 45.914,18.75 47,19.836 47,31.149 48.75,32.899 U1.16
SPI1_MOSI: J5.2 U1.17 | length 29.2
  Top Layer w0.3: J5.2 40,13 40.75,13.75 40.75,16.65 42.35,18.25 46.121,18.25 47.5,19.629 47.5,30.942 49.25,32.692 U1.17
SPI1_NSS: J5.3 U1.14 | length 28.2
  Top Layer w0.3: J5.3 35.75,17.5 38,19.75 45.5,19.75 46,20.25 46,31.563 47.75,33.313 U1.14
SPI1_SCK: J5.1 U1.15 | length 26.2
  Top Layer w0.3: J5.1 38.29,17.29 40.25,19.25 45.707,19.25 46.5,20.043 46.5,31.356 48.25,33.106 U1.15
SWCLK: J2.2 U1.37 | length 17.6
  Top Layer w0.3: U1.37 52.75,44 53.55,44.8 58.324,44.8 58.5,44.624 58.5,42.25 59,41.75 62.65,41.75 64.21,43.31 J2.2
SWDIO: J2.3 U1.34 | length 15
  Top Layer w0.3: U1.34 55.857,40.4 56.457,41 64.1,41 66.75,43.65 J2.3
USART1_RX: J12.2 U1.31 | length 42.4
  Top Layer w0.3: U1.31 56.831,38.9 57.131,39.2 58.768,39.2 v1(58.776,39.192)
  Bottom Layer w0.45: J12.2 33.5,54.109 33.734,53.875 49.225,53.875 52.25,50.85 52.25,47.464 52.514,47.2 55.8,47.2 58.776,44.224 v1(58.776,39.192)
USART1_TX: J12.1 U1.30 | length 44.2
  Top Layer w0.3: U1.30 57.038,38.4 57.167,38.529 v1(57.75,38.529)
  Top Layer w0.45: J12.1 34.924,58.04 35.3,57.664 v3(35.3,52.8)
  Bottom Layer w0.45: v3(35.3,52.8) 49.3,52.8 51.6,50.5 51.6,47.194 52.394,46.4 55.6,46.4 58,44 58,38.779 v1(57.75,38.529)
USART3_RX: J10.2 U1.22 | length 14.7
  Top Layer w0.3: U1.22 51.75,31.153 51,30.403 51,29.75 49,27.75 49,25.676 49.176,25.5 51.33,25.5 J10.2
USART3_TX: J10.1 U1.21 | length 13.7
  Top Layer w0.3: J10.1 48.676,23.79 48.5,23.966 48.5,28 50.5,30 50.5,30.61 51.25,31.36 51.25,32.376 U1.21
VBUS: C1.2 FB1.1 J3.1
XTALA: C5.2 R2.1 U1.5 Y1.1 | length 6.8
  Top Layer w0.3: R2.1 39.35,40.1 40.05,39.4 U1.5
XTALB: C6.2 R2.2 U1.6 Y1.2 | length 6.8
  Top Layer w0.3: R2.2 39.35,38.2 40.05,38.9 41,38.9 U1.6
XTALC: U1.3 Y2.1 | length 20.7
  Top Layer w0.3: Y2.1 32.701,46.101 33.855,47.255 39.495,47.255 41.4,45.35 41.4,41.307 42.307,40.4 U1.3
XTALD: U1.4 Y2.4 | length 22.5
  Top Layer w0.3: Y2.4 32.106,42.901 32.868,43.663 32.868,45.018 34.5,46.65 39.393,46.65 40.9,45.143 40.9,41.1 42.1,39.9 U1.4
pads on no net: J3.4 J3.6 J3.7 J3.8 J3.9 J3.10 J3.11 Y2.2 Y2.3
copper on no net:
  other v2: 25.12,13.375 26.88,13.375 65.12,13.375 66.88,13.375 23.875,14.62 28.125,14.62 63.875,14.62 68.125,14.62 23.875,16.38 28.125,16.38 63.875,16.38 68.125,16.38 25.12,17.625 26.88,17.625 65.12,17.625 66.88,17.625 25.12,53.375 26.88,53.375 65.12,53.375 66.88,53.375 23.875,54.62 28.125,54.62 63.875,54.62 68.125,54.62 23.875,56.38 28.125,56.38 63.875,56.38 68.125,56.38 25.12,57.625 26.88,57.625 65.12,57.625 66.88,57.625

## Polygon pours and split planes (outlines as drawn)
+5V on Top Layer "NONET_L01_P-001" (solid, pour order 23): 58.3,58.3 58.5,58.5 59.6,58.5 60.464,59.364 61.536,59.364 61.7,59.2 61.7,57.9 61.505,57.705 58.495,57.705 58.3,57.9
GND on Top Layer "NONET_L01_P-001" (solid, pour order 21): 58.25,57 58.45,57.2 61.55,57.2 61.7,57.05 61.7,55.9 61.65,55.85 60.032,55.85 59.382,56.5 58.45,56.5 58.25,56.7
+3V3 on Top Layer "NONET_L01_P-001" (solid, pour order 19): 66.6,31.4 66.4,31.2 66.4,29.6 65.4,28.6 65.4,23 65.7,22.7 68.5,22.7 68.8,23 68.8,28.6 68,29.6 68,32.8 66.6,32.8
+5V on Top Layer "NONET_L01_P-001" (solid, pour order 18): 63.9,30.9 63.8,31 63.8,32.8 62.6,32.8 62.4,33 62.4,34.5 62.9,35 62.9,37.1 61.4,37.1 61.2,36.9 61.2,29.6 61.6,29.2 65,29.2 65.2,29.4 65.2,30.7 65,30.9 64.6,30.9
GND on Top Layer "NONET_L01_P-001" (solid, pour order 17): 62.8,34.2 63,34.4 65.3,34.4 68.1,34.4 68.5,34 68.5,33.8 68.9,33.4 69.9,33.4 70.1,33.2 70.1,29.4 69.9,29.2 68.8,29.2 68.6,29.4 68.6,32.8 68.2,33.2 66.1,33.2 66,33.1 66,31.6 65.8,31.4 64.5,31.4 64.4,31.5 64.4,32.9 64.2,33.1 63.1,33.1 62.8,33.4
+5V on Top Layer "NONET_L01_P-001" (solid, pour order 16): 62.8,37 62.9,37.1 63.9,37.1 64,37 64,35.1 63.9,35 62.9,35 62.8,35.1
XTALB on Top Layer "NONET_L01_P-001" (solid, pour order 15): 35,31.7 34.8,31.9 34.8,37.9 34.9,38 38.2,38 38.4,38.2 38.4,38.8 38.5,38.9 40.1,38.9 40.2,38.8 40,38.6 40,35.6 39.8,35.4 36.7,35.4 36.3,35 36.3,31.9 36.1,31.7
+3V3 on Top Layer "NONET_L01_P-001" (solid, pour order 9): 52.6,35.3 52.7,35.4 56.4,35.4 56.5,35.3 56.5,33.9 56.3,33.7 53.2,33.7 52.9,33.4 52.7,33.4 52.6,33.5
XTALA on Top Layer "NONET_L01_P-001" (solid, pour order 13): 34.9,39.7 34.8,39.8 34.8,45.9 34.9,46 36.2,46 36.3,45.9 36.3,43.1 36.6,42.8 39.9,42.8 40,42.7 40,39.4 36.5,39.4 36.6,39.4 36.3,39.7
+3V3 on Top Layer "NONET_L01_P-001" (solid, pour order 10): 51.8,27.3 51.7,27.4 51.7,30.3 51.8,30.4 52.2,30.4 52.3,30.3 52.3,27.4 52.2,27.3
GND on Top Layer "NONET_L01_P-001" (solid, pour order 8): 53.7,31.7 53.6,31.8 53.6,33.2 53.7,33.3 56.5,33.3 56.6,33.2 56.6,31.8 56.5,31.7
NetD2_K on Top Layer "NONET_L01_P-001" (solid, pour order 6): 52.7,30.5 53,30.8 55.4,30.8 55.4,29.2 53.1,29.2 52.7,29.6
NetD1_K on Top Layer "NONET_L01_P-001" (solid, pour order 5): 52.7,28.2 53,28.5 55.4,28.5 55.4,27 53,27 52.7,27.3
VBUS on Top Layer "NONET_L01_P-001" (solid, pour order 0): 64.4,35.05 64.4,35.85 64.3,35.95 64.3,36.95 64.45,37.1 67.55,37.1 67.6,37.05 67.6,36.65 67.5,36.55 65.9,36.55 65.8,36.45 65.8,35.05 65.7,34.95 64.5,34.95
+3V3 on Int2 (PWR) "NONET_L01_P-001" (solid, pour order 4): 26,10.5 21,15.5 21,55.75 25.75,60.5 66,60.5 71,55.5 71,15.5 66,10.5
GND on Int1 (GND) "NONET_L01_P-001" (solid, pour order 3): 26,10.5 21,15.5 21,55.75 25.75,60.5 66,60.5 71,55.5 71,15.5 66,10.5

## Silkscreen, mask and mechanical layers (free items; w line width, h text height)
Bottom Overlay:
  text "GND PA09" at 29.382,53.913 h1.1 r180
  text "GND PB07" at 35.632,53.913 h1.1 r180
  text "GND NRX" at 42.132,53.913 h1.1 r180
  text "GND PA10" at 29.375,52.694 h1.1 r180
  text "GND PB06" at 35.625,52.694 h1.1 r180
  text "GND PTX" at 42.125,52.694 h1.1 r180
  text "USART1" at 29.659,51.249 h1.2 r180
  text "I2C1" at 35.909,51.249 h1.2 r180
  text "CAN" at 42.409,51.249 h1.2 r180
  text "3V3 BOOT0 GND" at 62.803,49.988 h1.1
  text "3V3 BOOT1 GND" at 62.803,47.448 h1.1
  text "3V3 DIO CLK GND" at 70.775,41.681 h1.1
  text "PB01 PB03" at 27.585,26.396 h1.1
  text "PB00 PA02" at 36.625,26.396 h1.1
  text "PB00 PA02" at 45.625,26.396 h1.1
  text "PB11 PB10" at 54.625,26.396 h1.1
  text "PA15 PA08" at 63.625,26.396 h1.1
  text "GND GND" at 27.578,25.177 h1.1
  text "GND GND" at 36.618,25.177 h1.1
  text "GND GND" at 45.618,25.177 h1.1
  text "GND GND" at 54.618,25.177 h1.1
  text "GND GND" at 63.618,25.177 h1.1
  text "ENCDR B" at 27.667,19.96 h1.2 r270
  text "ENCDR A" at 36.707,19.96 h1.2 r270
  text "ADC1" at 45.707,19.96 h1.2 r270
  text "USART3" at 54.707,19.96 h1.2 r270
  text "PWM" at 63.707,19.96 h1.2 r270
  text "PA05 PA04 GND" at 39.875,18.146 h1.1
  text "PB14 PB04 PC13" at 50.625,18.106 h1.1
  text "PA07 PA06 GND" at 39.868,16.927 h1.1
  text "PB15 PB13 PA03" at 50.618,16.887 h1.1
  text "3V3 | 5V | GND / 3V3 | 5V | GND" at 60.54,16.872 h1.2
  text "SPI1" at 39.641,11.609 h1.2 r270
  text "POWER" at 60.431,11.609 h1.2 r270
  text "GPIO" at 50.391,11.569 h1.2 r270
Mechanical 12:
  the board outline again, w0.254

## Text inside footprints (layer, text, board x,y; h text height)
D1: Bottom Component Outline "+" at 50.617,28.208 h0.5
D2: Bottom Component Outline "+" at 50.617,30.508 h0.5